# Altium PCB FPv1.3.2.PcbDoc (part 3 of 9)
Units mm, origin at the board's own origin, x right, y up, seen from the top; angles counter-clockwise.
Board outline 81.28 x 53.34 mm, 4 copper layers (Top Layer, GROUND PLANE, POWER PLANE, Bottom Layer); 98 components, 183 nets, 614 pads, 312 vias.
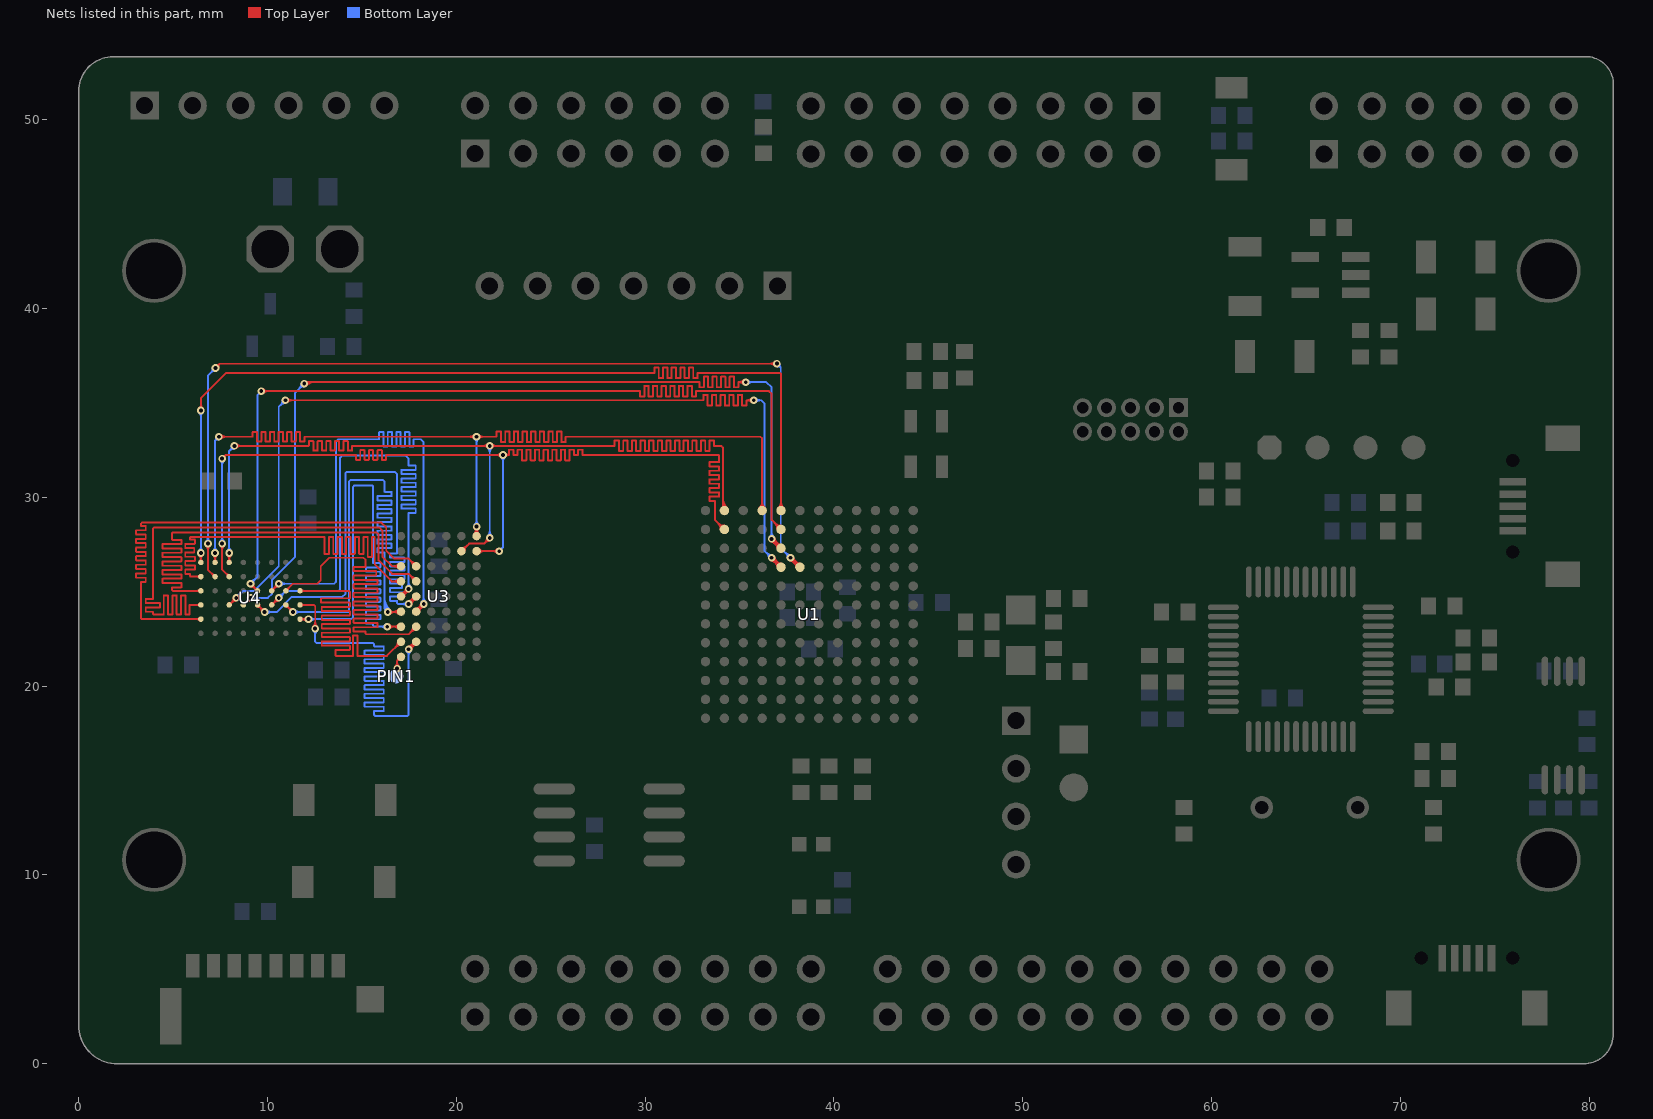
[diagram p5: the nets of this part, all layers, seen from the top]

## Via types
v1: diameter 0.403, hole 0.2, Top Layer to Bottom Layer, tented both sides, 261 vias
v2: diameter 0.503, hole 0.3, Top Layer to Bottom Layer, tented both sides, 25 vias
v3: diameter 0.6, hole 0.4, Top Layer to Bottom Layer, tented both sides, 11 vias
v4: diameter 0.508, hole 0.33, Top Layer to Bottom Layer, tented both sides, 5 vias
v5: diameter 0.703, hole 0.4, Top Layer to Bottom Layer, tented both sides, 3 vias
v6: diameter 0.603, hole 0.4, Top Layer to Bottom Layer, tented both sides, 2 vias
v7: diameter 0.503, hole 0.25, Top Layer to Bottom Layer, tented both sides, 2 vias
v8: diameter 0.6, hole 0.24, Top Layer to Bottom Layer, tented both sides, 1 vias
v9: diameter 0.508, hole 0.349, Top Layer to Bottom Layer, tented both sides, 1 vias
v10: diameter 0.603, hole 0.3, Top Layer to Bottom Layer, tented both sides, 1 vias

## Nets (pads, with @x,y where several pads share a name; then routed paths per layer and width w, separated by ;. In a path a pad name is that pad's centre, name@x,y a point inside that pad or via, vN(x,y) a via of type N, cw(c..) or ccw(c..) an arc to the next point about the centre after c; other vN are vias at no path point) (continued)
AD13: U1.B11 U3.B6 U4.F2 | length 65.9
  Top Layer w0.102: v1@7.493,27.443 cw(c7.236,27.186) 7.6,27.186 cw(c7.964,27.186) v1@7.707,27.443 ; v1(7.6,27.55) 7.6,26.175 U4.F2@7.975,25.8 ; v1(7.6,32.05) 7.792,32.242 ; v1@7.634,32.197 ccw(c7.673,32.361) 7.792,32.242 ; v1@7.747,32.084 cw(c7.911,32.123) 7.792,32.242 ; U4.F2@7.881,25.8 ccw(c7.653,25.8) 7.814,25.961 ccw(c7.975,26.122) U4.F2@7.975,25.894 ; U3.B6@21.075,27.15 v1(22.275,27.15) ; U3.B6@21.198,27.027 cw(c21.496,26.729) 21.496,27.15 cw(c21.496,27.571) U3.B6@21.198,27.273 ; v1@22.168,27.043 ccw(c21.911,26.786) 21.911,27.15 ccw(c21.911,27.514) v1@22.168,27.257 ; v1@22.368,32.135 ccw(c22.111,31.878) 22.111,32.242 ccw(c22.111,32.606) v1@22.368,32.348 ; v1@22.591,32.145 cw(c22.796,31.974) 22.796,32.242 ; v1@22.591,32.338 ccw(c22.796,32.509) 22.796,32.242 ; U1.B11@34.001,28.3 ccw(c33.52,28.3) 33.86,28.64 ccw(c34.2,28.98) U1.B11@34.2,28.499 ; U1.B11@34.2,28.3 33.706,28.794 33.706,29.807 33.415,29.807 cw(c33.415,29.818) 33.403,29.818 33.403,30.024 cw(c33.415,30.024) 33.415,30.035 33.907,30.035 ccw(c33.907,30.047) 33.918,30.047 33.918,30.253 ccw(c33.907,30.253) 33.907,30.264 33.415,30.264 cw(c33.415,30.276) 33.403,30.276 33.403,30.481 cw(c33.415,30.481) 33.415,30.493 33.907,30.493 ccw(c33.907,30.504) 33.918,30.504 33.918,30.71 ccw(c33.907,30.71) 33.907,30.721 33.415,30.721 cw(c33.415,30.733) 33.403,30.733 33.403,30.938 cw(c33.415,30.938) 33.415,30.95 33.907,30.95 ccw(c33.907,30.961) 33.918,30.961 33.918,31.167 ccw(c33.907,31.167) 33.907,31.178 33.415,31.178 cw(c33.415,31.19) 33.403,31.19 33.403,31.396 cw(c33.415,31.396) 33.415,31.407 33.907,31.407 ccw(c33.907,31.419) 33.918,31.419 33.918,31.624 ccw(c33.907,31.624) 33.907,31.636 33.415,31.636 cw(c33.415,31.647) 33.403,31.647 33.403,31.853 cw(c33.415,31.853) 33.415,31.864 33.907,31.864 ; 7.792,32.242 14.663,32.242 cw(c14.663,32.219) 14.686,32.219 14.686,32.011 ccw(c14.708,32.011) 14.708,31.988 14.891,31.988 ccw(c14.891,32.011) 14.914,32.011 14.914,32.473 cw(c14.937,32.473) 14.937,32.496 15.12,32.496 cw(c15.12,32.473) 15.143,32.473 15.143,32.011 ccw(c15.166,32.011) 15.166,31.988 15.348,31.988 ccw(c15.348,32.011) 15.371,32.011 15.371,32.473 cw(c15.394,32.473) 15.394,32.496 15.577,32.496 cw(c15.577,32.473) 15.6,32.473 15.6,32.011 ccw(c15.623,32.011) 15.623,31.988 15.806,31.988 ccw(c15.806,32.011) 15.829,32.011 15.829,32.473 cw(c15.851,32.473) 15.851,32.496 16.034,32.496 cw(c16.034,32.473) 16.057,32.473 16.057,32.011 ccw(c16.08,32.011) 16.08,31.988 16.263,31.988 ccw(c16.263,32.011) 16.286,32.011 16.286,32.219 cw(c16.309,32.219) 16.309,32.242 v1(22.475,32.242) 22.796,32.242 ; 22.796,32.242 22.796,32.51 cw(c22.808,32.51) 22.808,32.522 23.014,32.522 cw(c23.014,32.51) 23.025,32.51 23.025,32.242 23.254,32.242 23.254,32.51 cw(c23.265,32.51) 23.265,32.522 23.471,32.522 cw(c23.471,32.51) 23.482,32.51 23.482,31.973 ccw(c23.494,31.973) 23.494,31.961 23.699,31.961 ccw(c23.699,31.973) 23.711,31.973 23.711,32.51 cw(c23.722,32.51) 23.722,32.522 23.928,32.522 cw(c23.928,32.51) 23.939,32.51 23.939,31.973 ccw(c23.951,31.973) 23.951,31.961 24.157,31.961 ccw(c24.157,31.973) 24.168,31.973 24.168,32.51 cw(c24.18,32.51) 24.18,32.522 24.385,32.522 cw(c24.385,32.51) 24.397,32.51 24.397,31.973 ccw(c24.408,31.973) 24.408,31.961 24.614,31.961 ccw(c24.614,31.973) 24.625,31.973 24.625,32.51 cw(c24.637,32.51) 24.637,32.522 24.842,32.522 cw(c24.842,32.51) 24.854,32.51 24.854,31.973 ccw(c24.865,31.973) 24.865,31.961 25.071,31.961 ccw(c25.071,31.973) 25.082,31.973 25.082,32.51 cw(c25.094,32.51) 25.094,32.522 25.3,32.522 cw(c25.3,32.51) 25.311,32.51 25.311,31.973 ccw(c25.323,31.973) 25.323,31.961 25.528,31.961 ccw(c25.528,31.973) 25.54,31.973 25.54,32.51 cw(c25.551,32.51) 25.551,32.522 25.757,32.522 cw(c25.757,32.51) 25.768,32.51 25.768,31.973 ccw(c25.78,31.973) 25.78,31.961 25.985,31.961 ccw(c25.985,31.973) 25.997,31.973 25.997,32.51 cw(c26.008,32.51) 26.008,32.522 26.214,32.522 cw(c26.214,32.51) 26.226,32.51 26.226,32.242 26.454,32.242 26.454,32.51 cw(c26.466,32.51) 26.466,32.522 26.671,32.522 cw(c26.671,32.51) 26.683,32.51 26.683,32.242 33.9,32.242 33.918,32.224 33.918,31.876 ; 33.907,31.864 ccw(c33.907,31.876) 33.918,31.876 ; 33.907,31.864 33.918,31.876
  Bottom Layer w0.102: v1@7.493,27.657 ccw(c7.236,27.914) 7.6,27.914 ccw(c7.964,27.914) v1@7.707,27.657 ; v1@7.493,31.943 cw(c7.236,31.686) 7.6,31.686 cw(c7.964,31.686) v1@7.707,31.943 ; v1@7.6,27.525 v1(7.6,27.55) v1(7.6,32.05) ; v1(22.275,27.15) 22.475,27.35 v1(22.475,32.242) ; v1@22.368,32.135 cw(c22.111,31.878) 22.475,31.878 cw(c22.839,31.878) v1@22.582,32.135
AD14: U1.B12 U3.B5 U4.F1 | length 67.3
  Top Layer w0.102: v1@7.868,26.943 cw(c7.611,26.686) 7.975,26.686 cw(c8.339,26.686) v1@8.082,26.943 ; U4.F1@7.908,26.617 ccw(c7.748,26.777) 7.975,26.777 ccw(c8.202,26.777) U4.F1@8.042,26.617 ; U4.F1@7.975,26.55 v1(7.975,27.05) v1@7.975,27.1 ; v1(8.25,32.725) 12.175,32.725 12.2,32.75 12.2,32.956 cw(c12.223,32.956) 12.223,32.979 12.405,32.979 cw(c12.405,32.956) 12.428,32.956 12.428,32.494 ccw(c12.451,32.494) 12.451,32.471 12.634,32.471 ccw(c12.634,32.494) 12.657,32.494 12.657,32.956 cw(c12.68,32.956) 12.68,32.979 12.863,32.979 cw(c12.863,32.956) 12.886,32.956 12.886,32.494 ccw(c12.908,32.494) 12.908,32.471 13.091,32.471 ccw(c13.091,32.494) 13.114,32.494 13.114,32.956 cw(c13.137,32.956) 13.137,32.979 13.32,32.979 cw(c13.32,32.956) 13.343,32.956 13.343,32.494 ccw(c13.366,32.494) 13.366,32.471 13.548,32.471 ccw(c13.548,32.494) 13.571,32.494 13.571,32.956 cw(c13.594,32.956) 13.594,32.979 13.777,32.979 cw(c13.777,32.956) 13.8,32.956 13.8,32.494 ccw(c13.823,32.494) 13.823,32.471 14.006,32.471 ccw(c14.006,32.494) 14.029,32.494 14.029,32.956 cw(c14.051,32.956) 14.051,32.979 14.234,32.979 cw(c14.234,32.956) 14.257,32.956 14.257,32.494 ccw(c14.28,32.494) 14.28,32.471 14.463,32.471 ccw(c14.463,32.494) 14.486,32.494 14.486,32.702 cw(c14.509,32.702) 14.509,32.725 v1(21.775,32.725) 28.384,32.725 28.384,33.005 28.613,33.005 28.613,32.445 28.842,32.445 28.842,33.005 29.07,33.005 29.07,32.445 29.299,32.445 29.299,33.005 29.527,33.005 29.527,32.445 29.756,32.445 29.756,33.005 29.985,33.005 29.985,32.445 30.213,32.445 30.213,33.005 30.442,33.005 30.442,32.445 30.67,32.445 30.67,33.005 30.899,33.005 30.899,32.445 31.128,32.445 31.128,33.005 31.356,33.005 31.356,32.445 31.585,32.445 31.585,33.005 31.813,33.005 31.813,32.445 32.042,32.445 32.042,33.005 32.271,33.005 32.271,32.445 32.499,32.445 32.499,33.005 32.728,33.005 32.728,32.445 32.956,32.445 32.956,33.005 33.185,33.005 33.185,32.445 33.414,32.445 33.414,33.005 33.642,33.005 33.642,32.725 34.026,32.725 34.121,32.63 34.121,29.379 U1.B12@34.2,29.3 ; v1@8.357,32.618 cw(c8.614,32.361) 8.614,32.725 cw(c8.614,33.089) v1@8.357,32.832 ; U3.B5@20.275,27.15 20.675,27.55 21.475,27.55 v1(21.775,27.85) ; U3.B5@20.275,27.324 ccw(c20.275,27.745) 20.572,27.447 ccw(c20.87,27.15) U3.B5@20.449,27.15 ; v1@21.624,27.85 cw(c21.26,27.85) 21.518,27.593 cw(c21.775,27.335) v1@21.775,27.699 ; v1@21.668,32.618 ccw(c21.411,32.361) 21.411,32.725 ccw(c21.411,33.089) v1@21.668,32.832 ; v1@21.882,32.618 cw(c22.139,32.361) 22.139,32.725 cw(c22.139,33.089) v1@21.882,32.832 ; U1.B12@34.059,29.441 ccw(c33.91,29.59) 34.121,29.59 ; 34.121,29.726 ccw(c34.626,29.726) U1.B12@34.269,29.369 ; 34.121,29.971 ccw(c34.871,29.971) U1.B12@34.341,29.441
  Bottom Layer w0.102: v1@7.868,27.157 ccw(c7.611,27.414) 7.975,27.414 ccw(c8.339,27.414) v1@8.082,27.157 ; v1(7.975,27.05) 7.975,32.45 v1(8.25,32.725) ; v1@8.099,32.725 cw(c7.735,32.725) 7.993,32.468 cw(c8.25,32.21) v1@8.25,32.574 ; v1@21.668,27.957 ccw(c21.411,28.214) 21.775,28.214 ccw(c22.139,28.214) v1@21.882,27.957 ; v1@21.668,32.618 cw(c21.411,32.361) 21.775,32.361 cw(c22.139,32.361) v1@21.882,32.618 ; v1(21.775,27.85) v1(21.775,32.725)
AD15: U1.D12 U3.A6 U4.G1 | length 66.6
  Top Layer w0.102: v1@7.118,26.943 cw(c6.861,26.686) 7.225,26.686 cw(c7.589,26.686) v1@7.332,26.943 ; U4.G1@7.158,26.617 ccw(c6.998,26.777) 7.225,26.777 ccw(c7.452,26.777) U4.G1@7.292,26.617 ; U4.G1@7.225,26.55 v1(7.225,27.05) ; v1(7.429,33.208) 9.195,33.208 ccw(c9.195,33.231) 9.217,33.231 9.217,33.439 cw(c9.24,33.439) 9.24,33.462 9.423,33.462 cw(c9.423,33.439) 9.446,33.439 9.446,32.977 ccw(c9.469,32.977) 9.469,32.954 9.652,32.954 ccw(c9.652,32.977) 9.675,32.977 9.675,33.439 cw(c9.698,33.439) 9.698,33.462 9.88,33.462 cw(c9.88,33.439) 9.903,33.439 9.903,32.977 ccw(c9.926,32.977) 9.926,32.954 10.109,32.954 ccw(c10.109,32.977) 10.132,32.977 10.132,33.439 cw(c10.155,33.439) 10.155,33.462 10.338,33.462 cw(c10.338,33.439) 10.36,33.439 10.36,32.977 ccw(c10.383,32.977) 10.383,32.954 10.566,32.954 ccw(c10.566,32.977) 10.589,32.977 10.589,33.439 cw(c10.612,33.439) 10.612,33.462 10.795,33.462 cw(c10.795,33.439) 10.818,33.439 10.818,32.977 ccw(c10.841,32.977) 10.841,32.954 11.023,32.954 ccw(c11.023,32.977) 11.046,32.977 11.046,33.439 cw(c11.069,33.439) 11.069,33.462 11.252,33.462 cw(c11.252,33.439) 11.275,33.439 11.275,32.977 ccw(c11.298,32.977) 11.298,32.954 11.481,32.954 ccw(c11.481,32.977) 11.503,32.977 11.503,33.439 cw(c11.526,33.439) 11.526,33.462 11.709,33.462 cw(c11.709,33.439) 11.732,33.439 11.732,32.977 ccw(c11.755,32.977) 11.755,32.954 11.938,32.954 ccw(c11.938,32.977) 11.961,32.977 11.961,33.185 cw(c11.984,33.185) 11.984,33.208 v1(21.071,33.208) 22.136,33.208 22.136,33.477 cw(c22.148,33.477) 22.148,33.488 22.353,33.488 cw(c22.353,33.477) 22.365,33.477 22.365,32.94 ccw(c22.376,32.94) 22.376,32.928 22.582,32.928 ccw(c22.582,32.94) 22.593,32.94 22.593,33.477 cw(c22.605,33.477) 22.605,33.488 22.81,33.488 cw(c22.81,33.477) 22.822,33.477 22.822,32.94 ccw(c22.833,32.94) 22.833,32.928 23.039,32.928 ccw(c23.039,32.94) 23.05,32.94 23.05,33.477 cw(c23.062,33.477) 23.062,33.488 23.268,33.488 cw(c23.268,33.477) 23.279,33.477 23.279,32.94 ccw(c23.291,32.94) 23.291,32.928 23.496,32.928 ccw(c23.496,32.94) 23.508,32.94 23.508,33.477 cw(c23.519,33.477) 23.519,33.488 23.725,33.488 cw(c23.725,33.477) 23.736,33.477 23.736,32.94 ccw(c23.748,32.94) 23.748,32.928 23.953,32.928 ccw(c23.953,32.94) 23.965,32.94 23.965,33.477 cw(c23.976,33.477) 23.976,33.488 24.182,33.488 cw(c24.182,33.477) 24.194,33.477 24.194,32.94 ccw(c24.205,32.94) 24.205,32.928 24.411,32.928 ccw(c24.411,32.94) 24.422,32.94 24.422,33.477 cw(c24.434,33.477) 24.434,33.488 24.639,33.488 cw(c24.639,33.477) 24.651,33.477 24.651,32.94 ccw(c24.662,32.94) 24.662,32.928 24.868,32.928 ccw(c24.868,32.94) 24.879,32.94 24.879,33.477 cw(c24.891,33.477) 24.891,33.488 25.096,33.488 cw(c25.096,33.477) 25.108,33.477 25.108,32.94 ccw(c25.119,32.94) 25.119,32.928 25.325,32.928 ccw(c25.325,32.94) 25.336,32.94 25.336,33.477 cw(c25.348,33.477) 25.348,33.488 25.554,33.488 cw(c25.554,33.477) 25.565,33.477 25.565,32.94 ccw(c25.577,32.94) 25.577,32.928 25.782,32.928 ccw(c25.782,32.94) 25.794,32.94 25.794,33.208 36.108,33.208 36.2,33.117 U1.D12@36.2,29.3 ; v1@7.536,33.102 cw(c7.793,32.844) 7.793,33.208 cw(c7.793,33.572) v1@7.536,33.315 ; U3.A6@20.952,28.073 ccw(c20.654,28.371) 21.075,28.371 ccw(c21.496,28.371) U3.A6@21.198,28.073 ; v1@20.964,33.102 ccw(c20.707,32.844) 20.707,33.208 ccw(c20.707,33.572) v1@20.964,33.315 ; v1@20.968,28.343 cw(c20.711,28.086) 21.075,28.086 cw(c21.439,28.086) v1@21.182,28.343 ; v1@20.982,28.331 cw(c20.902,28.228) 21.028,28.195 cw(c21.193,28.15) v1@21.13,28.31 ; v1@21.02,28.31 cw(c20.956,28.15) 21.122,28.195 cw(c21.248,28.228) v1@21.168,28.331 ; U3.A6@21.075,27.95 v1(21.075,28.45) ; v1@21.177,33.102 cw(c21.435,32.844) 21.435,33.208 cw(c21.435,33.572) v1@21.177,33.315 ; U1.D12@36.059,29.441 ccw(c35.719,29.781) 36.2,29.781 ccw(c36.681,29.781) U1.D12@36.341,29.441
  Bottom Layer w0.102: v1@7.118,27.157 ccw(c6.861,27.414) 7.225,27.414 ccw(c7.589,27.414) v1@7.332,27.157 ; v1(7.225,27.05) 7.225,33.004 ; v1@7.281,33.182 cw(c7.083,33.146) 7.225,33.004 ; v1@7.403,33.06 ccw(c7.367,32.862) 7.225,33.004 ; v1(7.429,33.208) 7.225,33.004 ; v1@20.964,33.102 cw(c20.696,32.834) 21.075,32.834 ; v1@20.968,28.557 ccw(c20.711,28.814) 21.075,28.814 ccw(c21.439,28.814) v1@21.182,28.557 ; v1(21.071,33.208) 21.075,33.204 v1(21.075,28.45) ; 21.075,32.855 cw(c21.424,32.855) v1@21.177,33.102
AD16: U1.E9 U4.F4 | length 60.3
  Top Layer w0.102: U4.F4@7.975,24.3 v1(8.35,24.675) ; U4.F4@7.975,24.394 ccw(c7.975,24.621) 8.136,24.461 ; U4.F4@8.069,24.3 cw(c8.297,24.3) 8.136,24.461 ; v1@8.199,24.675 cw(c7.835,24.675) 8.092,24.418 cw(c8.35,24.16) v1@8.35,24.524 ; v1(10.95,35.142) 33.084,35.142 33.084,35.41 cw(c33.095,35.41) 33.095,35.422 33.301,35.422 cw(c33.301,35.41) 33.312,35.41 33.312,34.873 ccw(c33.324,34.873) 33.324,34.861 33.529,34.861 ccw(c33.529,34.873) 33.541,34.873 33.541,35.41 cw(c33.552,35.41) 33.552,35.422 33.758,35.422 cw(c33.758,35.41) 33.769,35.41 33.769,34.873 ccw(c33.781,34.873) 33.781,34.861 33.986,34.861 ccw(c33.986,34.873) 33.998,34.873 33.998,35.41 cw(c34.009,35.41) 34.009,35.422 34.215,35.422 cw(c34.215,35.41) 34.227,35.41 34.227,34.873 ccw(c34.238,34.873) 34.238,34.861 34.444,34.861 ccw(c34.444,34.873) 34.455,34.873 34.455,35.41 cw(c34.467,35.41) 34.467,35.422 34.672,35.422 cw(c34.672,35.41) 34.684,35.41 34.684,34.873 ccw(c34.695,34.873) 34.695,34.861 34.901,34.861 ccw(c34.901,34.873) 34.912,34.873 34.912,35.41 cw(c34.924,35.41) 34.924,35.422 35.129,35.422 cw(c35.129,35.41) 35.141,35.41 35.141,34.873 ccw(c35.152,34.873) 35.152,34.861 35.358,34.861 ccw(c35.358,34.873) 35.369,34.873 35.369,35.142 v1(35.75,35.142) ; v1@11.057,35.035 cw(c11.314,34.778) 11.314,35.142 cw(c11.314,35.505) v1@11.057,35.248 ; v1@35.643,35.035 ccw(c35.386,34.778) 35.386,35.142 ccw(c35.386,35.505) v1@35.643,35.248 ; v1@36.662,26.654 cw(c36.521,26.118) U1.E9@37.001,26.395 ; v1@36.688,26.753 cw(c36.608,26.449) 36.88,26.606 ; v1@36.7,26.649 cw(c36.7,26.285) 36.957,26.543 cw(c37.215,26.8) v1@36.851,26.8 ; v1(36.7,26.8) U1.E9@37.2,26.3 ; v1@36.747,26.812 ccw(c37.051,26.892) 36.894,26.62 ; v1@36.75,26.658 cw(c36.785,26.558) 36.877,26.611 ; v1@36.842,26.75 ccw(c36.942,26.715) 36.889,26.623 ; v1@36.846,26.838 ccw(c37.382,26.979) U1.E9@37.105,26.499 ; U1.E9@37.001,26.3 ccw(c36.52,26.3) 36.86,26.64 ccw(c37.2,26.98) U1.E9@37.2,26.499 ; v1@36.739,26.654 cw(c36.781,26.496) 36.863,26.638 ccw(c36.781,26.496) v1@36.739,26.654 ; v1@36.846,26.761 ccw(c37.004,26.719) 36.862,26.637 cw(c37.004,26.719) v1@36.846,26.761
  Bottom Layer w0.102: v1(8.35,24.675) 8.725,25.05 9.3,25.05 10.6,26.35 10.6,34.792 v1(10.95,35.142) ; v1@8.35,24.826 ccw(c8.35,25.19) 8.607,24.932 ccw(c8.865,24.675) v1@8.501,24.675 ; v1@10.799,35.142 cw(c10.435,35.142) 10.693,34.884 cw(c10.95,34.627) v1@10.95,34.991 ; v1(35.75,35.142) 36.156,35.142 36.322,34.976 36.322,27.178 v1(36.7,26.8) ; v1@35.857,35.035 cw(c36.114,34.778) 36.114,35.142 cw(c36.114,35.505) v1@35.857,35.248 ; v1@36.549,26.8 ccw(c36.185,26.8) 36.443,27.057 ccw(c36.7,27.315) v1@36.7,26.951
AD17: U1.E10 U4.E4 | length 60.3
  Top Layer w0.102: U4.E4@8.725,24.3 v1(9.1,24.675) ; U4.E4@8.725,24.394 ccw(c8.725,24.622) 8.886,24.461 ccw(c9.047,24.3) U4.E4@8.819,24.3 ; v1@8.949,24.675 cw(c8.585,24.675) 8.843,24.418 cw(c9.1,24.16) v1@9.1,24.524 ; v1(11.95,36.025) 12.033,36.108 32.88,36.108 32.88,35.84 ccw(c32.892,35.84) 32.892,35.828 33.097,35.828 ccw(c33.097,35.84) 33.109,35.84 33.109,36.377 cw(c33.12,36.377) 33.12,36.388 33.326,36.388 cw(c33.326,36.377) 33.337,36.377 33.337,35.84 ccw(c33.349,35.84) 33.349,35.828 33.555,35.828 ccw(c33.555,35.84) 33.566,35.84 33.566,36.377 cw(c33.578,36.377) 33.578,36.388 33.783,36.388 cw(c33.783,36.377) 33.795,36.377 33.795,35.84 ccw(c33.806,35.84) 33.806,35.828 34.012,35.828 ccw(c34.012,35.84) 34.023,35.84 34.023,36.377 cw(c34.035,36.377) 34.035,36.388 34.24,36.388 cw(c34.24,36.377) 34.252,36.377 34.252,35.84 ccw(c34.263,35.84) 34.263,35.828 34.469,35.828 ccw(c34.469,35.84) 34.48,35.84 34.48,36.377 cw(c34.492,36.377) 34.492,36.388 34.698,36.388 cw(c34.698,36.377) 34.709,36.377 34.709,35.84 ccw(c34.721,35.84) 34.721,35.828 34.926,35.828 ccw(c34.926,35.84) 34.938,35.84 34.938,36.108 35.317,36.108 v1(35.325,36.1) ; v1@11.985,35.99 cw(c12.27,35.705) 12.27,36.108 ; v1@12.057,35.918 cw(c12.515,35.46) 12.515,36.108 ; 34.941,36.108 cw(c34.941,35.716) v1@35.218,35.993 ; 34.981,36.108 ccw(c34.981,36.444) v1@35.218,36.207 ; v1@36.662,27.654 cw(c36.521,27.118) U1.E10@37.001,27.395 ; v1@36.688,27.753 cw(c36.608,27.449) 36.88,27.606 ; v1@36.7,27.649 cw(c36.7,27.285) 36.957,27.543 cw(c37.215,27.8) v1@36.851,27.8 ; v1(36.7,27.8) U1.E10@37.2,27.3 ; v1@36.747,27.812 ccw(c37.051,27.892) 36.894,27.62 ; v1@36.75,27.658 cw(c36.785,27.558) 36.877,27.611 ; v1@36.842,27.75 ccw(c36.942,27.715) 36.889,27.623 ; v1@36.846,27.838 ccw(c37.382,27.979) U1.E10@37.105,27.499 ; U1.E10@37.001,27.3 ccw(c36.52,27.3) 36.86,27.64 ccw(c37.2,27.98) U1.E10@37.2,27.499 ; v1@36.739,27.654 cw(c36.781,27.496) 36.863,27.638 ccw(c36.781,27.496) v1@36.739,27.654 ; v1@36.846,27.761 ccw(c37.004,27.719) 36.862,27.637 cw(c37.004,27.719) v1@36.846,27.761
  Bottom Layer w0.102: v1(9.1,24.675) 10.025,24.675 10.25,24.9 10.25,25.274 10.246,25.278 10.246,25.634 11.45,26.838 11.45,35.525 v1(11.95,36.025) ; v1@9.207,24.568 cw(c9.464,24.311) 9.464,24.675 cw(c9.464,25.039) v1@9.207,24.782 ; v1@11.799,36.025 cw(c11.435,36.025) 11.693,35.768 cw(c11.95,35.51) v1@11.95,35.874 ; v1(35.325,36.1) 36.417,36.1 36.7,35.817 v1(36.7,27.8) ; v1@35.432,35.993 cw(c35.689,35.736) 35.689,36.1 cw(c35.689,36.464) v1@35.432,36.207 ; v1@36.593,27.907 ccw(c36.336,28.164) 36.7,28.164 ccw(c37.064,28.164) v1@36.807,27.907
AD18: U1.E11 U4.D3 | length 55.4
  Top Layer w0.102: v1@9.1,25.274 cw(c9.1,24.91) 9.357,25.168 cw(c9.615,25.425) v1@9.251,25.425 ; v1(9.1,25.425) U4.D3@9.475,25.05 ; U4.D3@9.381,25.05 ccw(c9.153,25.05) 9.314,25.211 ccw(c9.475,25.372) U4.D3@9.475,25.144 ; v1(9.675,35.625) 29.731,35.625 29.731,35.356 ccw(c29.742,35.356) 29.742,35.345 29.948,35.345 ccw(c29.948,35.356) 29.959,35.356 29.959,35.894 cw(c29.971,35.894) 29.971,35.905 30.176,35.905 cw(c30.176,35.894) 30.188,35.894 30.188,35.356 ccw(c30.199,35.356) 30.199,35.345 30.405,35.345 ccw(c30.405,35.356) 30.416,35.356 30.416,35.894 cw(c30.428,35.894) 30.428,35.905 30.634,35.905 cw(c30.634,35.894) 30.645,35.894 30.645,35.356 ccw(c30.657,35.356) 30.657,35.345 30.862,35.345 ccw(c30.862,35.356) 30.874,35.356 30.874,35.894 cw(c30.885,35.894) 30.885,35.905 31.091,35.905 cw(c31.091,35.894) 31.102,35.894 31.102,35.356 ccw(c31.114,35.356) 31.114,35.345 31.319,35.345 ccw(c31.319,35.356) 31.331,35.356 31.331,35.894 cw(c31.342,35.894) 31.342,35.905 31.548,35.905 cw(c31.548,35.894) 31.559,35.894 31.559,35.356 ccw(c31.571,35.356) 31.571,35.345 31.777,35.345 ccw(c31.777,35.356) 31.788,35.356 31.788,35.894 cw(c31.8,35.894) 31.8,35.905 32.005,35.905 cw(c32.005,35.894) 32.017,35.894 32.017,35.356 ccw(c32.028,35.356) 32.028,35.345 32.234,35.345 ccw(c32.234,35.356) 32.245,35.356 32.245,35.894 cw(c32.257,35.894) 32.257,35.905 32.462,35.905 cw(c32.462,35.894) 32.474,35.894 32.474,35.356 ccw(c32.485,35.356) 32.485,35.345 32.691,35.345 ccw(c32.691,35.356) 32.703,35.356 32.703,35.625 36.562,35.625 36.7,35.487 36.7,28.8 U1.E11@37.2,28.3 ; v1@9.782,35.518 cw(c10.039,35.261) 10.039,35.625 cw(c10.039,35.989) v1@9.782,35.732 ; U1.E11@37.001,28.3 ccw(c36.52,28.3) 36.86,28.64 ccw(c37.2,28.98) U1.E11@37.2,28.499
  Bottom Layer w0.102: v1(9.1,25.425) 9.475,25.8 9.475,35.425 v1(9.675,35.625) ; v1@9.1,25.576 ccw(c9.1,25.94) 9.357,25.682 ccw(c9.615,25.425) v1@9.251,25.425
AD19: U1.E12 U4.H1 | length 56.1
  Top Layer w0.102: v1@6.368,26.943 cw(c6.111,26.686) 6.475,26.686 cw(c6.839,26.686) v1@6.582,26.943 ; v1@6.368,34.707 ccw(c6.081,34.994) 6.488,34.994 ; U4.H1@6.408,26.617 ccw(c6.248,26.777) 6.475,26.777 ccw(c6.702,26.777) U4.H1@6.542,26.617 ; U4.H1@6.475,26.55 v1(6.475,27.05) ; v1@6.488,34.613 6.488,35.262 7.817,36.592 30.493,36.592 30.493,36.86 cw(c30.504,36.86) 30.504,36.872 30.71,36.872 cw(c30.71,36.86) 30.721,36.86 30.721,36.323 ccw(c30.733,36.323) 30.733,36.311 30.938,36.311 ccw(c30.938,36.323) 30.95,36.323 30.95,36.86 cw(c30.961,36.86) 30.961,36.872 31.167,36.872 cw(c31.167,36.86) 31.178,36.86 31.178,36.323 ccw(c31.19,36.323) 31.19,36.311 31.396,36.311 ccw(c31.396,36.323) 31.407,36.323 31.407,36.86 cw(c31.419,36.86) 31.419,36.872 31.624,36.872 cw(c31.624,36.86) 31.636,36.86 31.636,36.323 ccw(c31.647,36.323) 31.647,36.311 31.853,36.311 ccw(c31.853,36.323) 31.864,36.323 31.864,36.86 cw(c31.876,36.86) 31.876,36.872 32.081,36.872 cw(c32.081,36.86) 32.093,36.86 32.093,36.323 ccw(c32.104,36.323) 32.104,36.311 32.31,36.311 ccw(c32.31,36.323) 32.322,36.323 32.322,36.86 cw(c32.333,36.86) 32.333,36.872 32.539,36.872 cw(c32.539,36.86) 32.55,36.86 32.55,36.323 ccw(c32.562,36.323) 32.562,36.311 32.767,36.311 ccw(c32.767,36.323) 32.779,36.323 32.779,36.592 37.145,36.592 37.2,36.536 U1.E12@37.2,29.3 ; 6.488,34.934 ccw(c6.809,34.934) v1@6.582,34.707 ; U1.E12@37.059,29.441 ccw(c36.719,29.781) 37.2,29.781 ccw(c37.681,29.781) U1.E12@37.341,29.441
  Bottom Layer w0.102: v1@6.368,27.157 ccw(c6.111,27.414) 6.475,27.414 ccw(c6.839,27.414) v1@6.582,27.157 ; v1@6.368,34.493 cw(c6.111,34.236) 6.475,34.236 cw(c6.839,34.236) v1@6.582,34.493 ; v1(6.475,27.05) v1(6.475,34.6)
AD20: U1.F9 U4.G2 | length 60.1
  Top Layer w0.102: v1@6.743,27.443 cw(c6.486,27.186) 6.85,27.186 cw(c7.214,27.186) v1@6.957,27.443 ; v1(6.85,27.55) 6.85,26.175 U4.G2@7.225,25.8 ; U4.G2@7.131,25.8 ccw(c6.903,25.8) 7.064,25.961 ccw(c7.225,26.122) U4.G2@7.225,25.894 ; v1(7.25,36.85) 7.475,37.075 ; v1@7.265,37 ccw(c7.291,37.259) 7.475,37.075 ; v1@7.4,36.865 cw(c7.659,36.891) 7.475,37.075 ; 36.597,37.075 ccw(c36.597,37.47) v1@36.876,37.191 ; 36.64,37.075 cw(c36.64,36.742) v1@36.876,36.977 ; v1@36.982,37.075 7.475,37.075 ; v1@37.662,26.654 cw(c37.521,26.118) U1.F9@38.001,26.395 ; v1@37.688,26.753 cw(c37.608,26.449) 37.88,26.606 ; v1@37.7,26.649 cw(c37.7,26.285) 37.957,26.543 cw(c38.215,26.8) v1@37.851,26.8 ; v1(37.7,26.8) U1.F9@38.2,26.3 ; v1@37.747,26.812 ccw(c38.051,26.892) 37.894,26.62 ; v1@37.75,26.658 cw(c37.785,26.558) 37.877,26.611 ; v1@37.842,26.75 ccw(c37.942,26.715) 37.889,26.623 ; v1@37.846,26.838 ccw(c38.382,26.979) U1.F9@38.105,26.499 ; U1.F9@38.001,26.3 ccw(c37.52,26.3) 37.86,26.64 ccw(c38.2,26.98) U1.F9@38.2,26.499 ; v1@37.739,26.654 cw(c37.781,26.496) 37.863,26.638 ccw(c37.781,26.496) v1@37.739,26.654 ; v1@37.846,26.761 ccw(c38.004,26.719) 37.862,26.637 cw(c38.004,26.719) v1@37.846,26.761
  Bottom Layer w0.102: v1@6.743,27.657 ccw(c6.477,27.923) 6.854,27.923 ; v1(6.85,27.55) 6.85,27.525 6.854,27.529 6.854,27.55 6.854,34.522 6.85,34.525 6.85,36.45 v1(7.25,36.85) ; 6.854,27.904 ccw(c7.204,27.904) v1@6.957,27.657 ; v1@7.099,36.85 cw(c6.735,36.85) 6.993,36.593 cw(c7.25,36.335) v1@7.25,36.699 ; v1(36.982,37.084) 37.186,36.881 ; v1@37.009,36.936 cw(c37.045,36.74) 37.186,36.881 ; v1@37.131,37.057 ccw(c37.326,37.021) 37.186,36.881 ; v1@37.549,26.8 ccw(c37.185,26.8) 37.443,27.057 ccw(c37.7,27.315) v1@37.7,26.951 ; v1(37.7,26.8) 37.186,27.314 37.186,36.881
ADDR0: PIN1.1 U3.J1 | length 1.6
  Top Layer w0.102: v1@16.759,21.036 ccw(c16.502,21.293) 16.866,21.293 ccw(c17.229,21.293) v1@16.972,21.036 ; v1(16.866,20.93) 16.866,21.341 ; U3.J1@16.907,21.502 cw(c16.749,21.457) 16.866,21.341 ; U3.J1@17.027,21.382 ccw(c16.982,21.224) 16.866,21.341 ; U3.J1@17.075,21.55 16.866,21.341
ADDR1: U3.H1 U4.A3 | length 31.4
  Top Layer w0.102: U4.A3@11.725,25.05 14.3,25.05 14.362,24.988 14.362,24.68 cw(c14.339,24.68) 14.339,24.657 12.861,24.657 ccw(c12.861,24.634) 12.838,24.634 12.838,24.451 ccw(c12.861,24.451) 12.861,24.429 14.339,24.429 cw(c14.339,24.406) 14.362,24.406 14.362,24.223 cw(c14.339,24.223) 14.339,24.2 12.901,24.2 ccw(c12.901,24.177) 12.878,24.177 12.878,23.994 ccw(c12.901,23.994) 12.901,23.971 14.339,23.971 cw(c14.339,23.948) 14.362,23.948 14.362,23.766 cw(c14.339,23.766) 14.339,23.743 12.901,23.743 ccw(c12.901,23.72) 12.878,23.72 12.878,23.537 ccw(c12.901,23.537) 12.901,23.514 14.339,23.514 cw(c14.339,23.491) 14.362,23.491 14.362,23.308 cw(c14.339,23.308) 14.339,23.286 12.901,23.286 ccw(c12.901,23.263) 12.878,23.263 12.878,23.08 ccw(c12.901,23.08) 12.901,23.057 14.339,23.057 cw(c14.339,23.034) 14.362,23.034 14.362,22.851 cw(c14.339,22.851) 14.339,22.828 12.901,22.828 ccw(c12.901,22.805) 12.878,22.805 12.878,22.623 ccw(c12.901,22.623) 12.901,22.6 14.339,22.6 cw(c14.339,22.577) 14.362,22.577 14.362,22.394 cw(c14.339,22.394) 14.339,22.371 12.901,22.371 ccw(c12.901,22.348) 12.878,22.348 12.878,22.165 ccw(c12.901,22.165) 12.901,22.143 14.339,22.143 cw(c14.339,22.12) 14.362,22.12 14.362,21.937 cw(c14.339,21.937) 14.339,21.914 13.623,21.914 ccw(c13.623,21.891) 13.6,21.891 13.6,21.625 13.625,21.6 14.516,21.6 ccw(c14.516,21.623) 14.539,21.623 14.539,22.663 cw(c14.562,22.663) 14.562,22.686 14.745,22.686 cw(c14.745,22.663) 14.768,22.663 14.768,21.6 16.325,21.6 U3.H1@17.075,22.35 ; U4.A3@11.792,24.983 cw(c11.952,24.823) 11.952,25.05 cw(c11.952,25.277) U4.A3@11.792,25.117 ; U3.H1@16.901,22.35 cw(c16.48,22.35) 16.778,22.053 cw(c17.075,21.755) U3.H1@17.075,22.176
ADDR2: U3.H2 U4.A4 | length 34.8
  Top Layer w0.102: U4.A4@11.725,24.3 12.45,24.3 12.53,24.22 v1@12.53,23.059 ; U4.A4@11.792,24.233 cw(c11.952,24.073) 11.952,24.3 cw(c11.952,24.527) U4.A4@11.792,24.367 ; v1@12.418,23.157 ccw(c12.149,23.426) 12.53,23.426 ; 12.53,23.402 ccw(c12.877,23.402) v1@12.632,23.157 ; v1@17.456,22.099 ccw(c17.415,22.423) U3.H2@17.697,22.26 ; v1(17.475,21.95) U3.H2@17.875,22.35 ; v1@17.475,22.101 ccw(c17.475,22.465) 17.732,22.207 ccw(c17.99,21.95) v1@17.626,21.95 ; v1@17.514,22.096 ccw(c17.575,22.323) 17.693,22.119 ; v1@17.621,21.989 cw(c17.848,22.05) 17.644,22.168 ; v1@17.624,21.931 cw(c17.948,21.89) U3.H2@17.785,22.172 ; U3.H2@17.701,22.35 cw(c17.28,22.35) 17.578,22.053 cw(c17.875,21.755) U3.H2@17.875,22.176
  Bottom Layer w0.102: v1@12.418,22.943 cw(c12.161,22.686) 12.525,22.686 cw(c12.889,22.686) v1@12.632,22.943 ; v1(12.525,23.05) 12.525,22.35 12.6,22.275 15.6,22.275 15.65,22.225 15.65,22.134 ccw(c15.673,22.134) 15.673,22.111 16.135,22.111 cw(c16.135,22.088) 16.158,22.088 16.158,21.905 cw(c16.135,21.905) 16.135,21.882 15.165,21.882 ccw(c15.165,21.859) 15.142,21.859 15.142,21.676 ccw(c15.165,21.676) 15.165,21.653 16.135,21.653 cw(c16.135,21.631) 16.158,21.631 16.158,21.448 cw(c16.135,21.448) 16.135,21.425 15.165,21.425 ccw(c15.165,21.402) 15.142,21.402 15.142,21.219 ccw(c15.165,21.219) 15.165,21.196 16.135,21.196 cw(c16.135,21.173) 16.158,21.173 16.158,20.991 cw(c16.135,20.991) 16.135,20.968 15.165,20.968 ccw(c15.165,20.945) 15.142,20.945 15.142,20.762 ccw(c15.165,20.762) 15.165,20.739 16.135,20.739 cw(c16.135,20.716) 16.158,20.716 16.158,20.533 cw(c16.135,20.533) 16.135,20.511 15.165,20.511 ccw(c15.165,20.488) 15.142,20.488 15.142,20.305 ccw(c15.165,20.305) 15.165,20.282 16.135,20.282 cw(c16.135,20.259) 16.158,20.259 16.158,20.076 cw(c16.135,20.076) 16.135,20.053 15.165,20.053 ccw(c15.165,20.03) 15.142,20.03 15.142,19.848 ccw(c15.165,19.848) 15.165,19.825 16.135,19.825 cw(c16.135,19.802) 16.158,19.802 16.158,19.619 cw(c16.135,19.619) 16.135,19.596 15.165,19.596 ccw(c15.165,19.573) 15.142,19.573 15.142,19.39 ccw(c15.165,19.39) 15.165,19.367 16.135,19.367 cw(c16.135,19.345) 16.158,19.345 16.158,19.162 cw(c16.135,19.162) 16.135,19.139 15.165,19.139 ccw(c15.165,19.116) 15.142,19.116 15.142,18.933 ccw(c15.165,18.933) 15.165,18.91 16.135,18.91 cw(c16.135,18.887) 16.158,18.887 16.158,18.705 cw(c16.135,18.705) 16.135,18.682 15.65,18.682 15.65,18.475 15.7,18.425 17.425,18.425 17.475,18.475 v1(17.475,21.95) ; 15.65,18.659 cw(c15.673,18.659) 15.673,18.682 ; v1@17.368,21.843 cw(c17.111,21.586) 17.475,21.586 cw(c17.839,21.586) v1@17.582,21.843
ADDR3: U3.G1 U4.A5 | length 33.4
  Top Layer w0.102: U4.A5@11.725,23.55 v1(12.175,23.55) ; U4.A5@11.792,23.483 cw(c11.952,23.323) 11.952,23.55 cw(c11.952,23.777) U4.A5@11.792,23.617 ; v1@12.068,23.443 ccw(c11.811,23.186) 11.811,23.55 ccw(c11.811,23.914) v1@12.068,23.657 ; v1(16.35,23.15) U3.G1@17.075,23.15 ; v1@16.457,23.043 cw(c16.714,22.786) 16.714,23.15 cw(c16.714,23.514) v1@16.457,23.257 ; U3.G1@16.952,23.027 ccw(c16.654,22.729) 16.654,23.15 ccw(c16.654,23.571) U3.G1@16.952,23.273
  Bottom Layer w0.102: v1(12.175,23.55) 14.425,23.55 14.531,23.656 14.531,30.559 14.605,30.632 15.545,30.632 15.599,30.578 15.599,26.539 ccw(c15.622,26.539) 15.622,26.516 15.957,26.516 cw(c15.957,26.493) 15.98,26.493 15.98,26.31 cw(c15.957,26.31) 15.957,26.287 15.241,26.287 ccw(c15.241,26.264) 15.218,26.264 15.218,26.081 ccw(c15.241,26.081) 15.241,26.058 15.957,26.058 cw(c15.957,26.036) 15.98,26.036 15.98,25.853 cw(c15.957,25.853) 15.957,25.83 15.241,25.83 ccw(c15.241,25.807) 15.218,25.807 15.218,25.624 ccw(c15.241,25.624) 15.241,25.601 15.957,25.601 cw(c15.957,25.578) 15.98,25.578 15.98,25.396 cw(c15.957,25.396) 15.957,25.373 15.241,25.373 ccw(c15.241,25.35) 15.218,25.35 15.218,25.167 ccw(c15.241,25.167) 15.241,25.144 15.957,25.144 cw(c15.957,25.121) 15.98,25.121 15.98,24.938 cw(c15.957,24.938) 15.957,24.915 15.241,24.915 ccw(c15.241,24.893) 15.218,24.893 15.218,24.71 ccw(c15.241,24.71) 15.241,24.687 15.957,24.687 cw(c15.957,24.664) 15.98,24.664 15.98,24.481 cw(c15.957,24.481) 15.957,24.458 15.241,24.458 ccw(c15.241,24.435) 15.218,24.435 15.218,24.253 ccw(c15.241,24.253) 15.241,24.23 15.957,24.23 cw(c15.957,24.207) 15.98,24.207 15.98,24.024 cw(c15.957,24.024) 15.957,24.001 15.241,24.001 ccw(c15.241,23.978) 15.218,23.978 15.218,23.795 ccw(c15.241,23.795) 15.241,23.772 15.957,23.772 cw(c15.957,23.75) 15.98,23.75 15.98,23.567 cw(c15.957,23.567) 15.957,23.544 15.241,23.544 ccw(c15.241,23.521) 15.218,23.521 15.218,23.338 ccw(c15.241,23.338) 15.241,23.315 15.576,23.315 cw(c15.576,23.292) 15.599,23.292 15.599,23.201 15.65,23.15 v1(16.35,23.15) ; v1@12.282,23.443 cw(c12.539,23.186) 12.539,23.55 cw(c12.539,23.914) v1@12.282,23.657 ; v1@16.243,23.043 ccw(c15.986,22.786) 15.986,23.15 ccw(c15.986,23.514) v1@16.243,23.257
ADDR4: U3.G2 U4.B3 | length 31.8
  Top Layer w0.102: U4.B3@10.975,25.05 11.35,25.425 12.65,25.425 12.825,25.6 12.825,26.35 13.275,26.8 15.085,26.8 15.2,26.685 15.2,26.341 cw(c15.177,26.341) 15.177,26.318 14.588,26.318 ccw(c14.588,26.295) 14.565,26.295 14.565,26.113 ccw(c14.588,26.113) 14.588,26.09 15.739,26.09 cw(c15.739,26.067) 15.761,26.067 15.761,25.884 cw(c15.739,25.884) 15.739,25.861 14.588,25.861 ccw(c14.588,25.838) 14.565,25.838 14.565,25.655 ccw(c14.588,25.655) 14.588,25.633 15.812,25.633 cw(c15.812,25.61) 15.835,25.61 15.835,25.427 cw(c15.812,25.427) 15.812,25.404 14.588,25.404 ccw(c14.588,25.381) 14.565,25.381 14.565,25.198 ccw(c14.588,25.198) 14.588,25.175 15.812,25.175 cw(c15.812,25.152) 15.835,25.152 15.835,24.97 cw(c15.812,24.97) 15.812,24.947 14.588,24.947 ccw(c14.588,24.924) 14.565,24.924 14.565,24.741 ccw(c14.588,24.741) 14.588,24.718 15.812,24.718 cw(c15.812,24.695) 15.835,24.695 15.835,24.512 cw(c15.812,24.512) 15.812,24.49 14.588,24.49 ccw(c14.588,24.467) 14.565,24.467 14.565,24.284 ccw(c14.588,24.284) 14.588,24.261 15.812,24.261 cw(c15.812,24.238) 15.835,24.238 15.835,24.055 cw(c15.812,24.055) 15.812,24.032 14.588,24.032 ccw(c14.588,24.009) 14.565,24.009 14.565,23.827 ccw(c14.588,23.827) 14.588,23.804 15.812,23.804 cw(c15.812,23.781) 15.835,23.781 15.835,23.598 cw(c15.812,23.598) 15.812,23.575 14.588,23.575 ccw(c14.588,23.552) 14.565,23.552 14.565,23.369 ccw(c14.588,23.369) 14.588,23.347 15.812,23.347 cw(c15.812,23.324) 15.835,23.324 15.835,23.141 cw(c15.812,23.141) 15.812,23.118 14.588,23.118 ccw(c14.588,23.095) 14.565,23.095 14.565,22.912 ccw(c14.588,22.912) 14.588,22.889 15.177,22.889 cw(c15.177,22.866) 15.2,22.866 15.2,22.775 15.225,22.75 16.3,22.75 ; U4.B3@10.975,25.144 ccw(c10.975,25.372) 11.136,25.211 ccw(c11.297,25.05) U4.B3@11.069,25.05 ; 16.292,22.758 16.3,22.75 ; U3.G2@17.701,23.15 cw(c17.28,23.15) 17.578,22.853 cw(c17.875,22.555) U3.G2@17.875,22.976 ; U3.G2@17.875,23.15 17.475,22.75 16.3,22.75
ADDR5: U3.F1 U4.B4 | length 35
  Top Layer w0.102: U4.B4@10.975,24.206 cw(c10.975,23.978) 11.136,24.139 cw(c11.297,24.3) U4.B4@11.069,24.3 ; U4.B4@10.975,24.3 v1(11.35,23.925) ; v1@11.199,23.925 ccw(c10.835,23.925) 11.093,24.182 ccw(c11.35,24.44) v1@11.35,24.076 ; v1@16.375,23.922 17.047,23.922 U3.F1@17.075,23.95 ; v1@16.482,23.818 cw(c16.731,23.569) 16.731,23.922 ; v1@16.482,24.032 ccw(c16.747,24.297) 16.747,23.922 ; 16.586,23.922 ccw(c16.586,24.439) U3.F1@16.952,24.073 ; 16.723,23.922 cw(c16.723,23.598) U3.F1@16.952,23.827 ; 16.832,23.922 ccw(c16.832,24.193) U3.F1@17.024,24.001
  Bottom Layer w0.102: v1(11.35,23.925) 14.275,23.925 14.328,23.978 14.328,30.85 14.403,30.925 16.1,30.925 16.2,30.825 16.2,30.475 16.2,30.313 ccw(c16.223,30.313) 16.223,30.29 16.558,30.29 cw(c16.558,30.267) 16.581,30.267 16.581,30.084 cw(c16.558,30.084) 16.558,30.061 16.2,30.061 15.842,30.061 ccw(c15.842,30.038) 15.819,30.038 15.819,29.855 ccw(c15.842,29.855) 15.842,29.833 16.2,29.833 16.558,29.833 cw(c16.558,29.81) 16.581,29.81 16.581,29.627 cw(c16.558,29.627) 16.558,29.604 16.2,29.604 15.842,29.604 ccw(c15.842,29.581) 15.819,29.581 15.819,29.398 ccw(c15.842,29.398) 15.842,29.375 16.2,29.375 16.558,29.375 cw(c16.558,29.352) 16.581,29.352 16.581,29.17 cw(c16.558,29.17) 16.558,29.147 16.2,29.147 15.842,29.147 ccw(c15.842,29.124) 15.819,29.124 15.819,28.941 ccw(c15.842,28.941) 15.842,28.918 16.2,28.918 16.558,28.918 cw(c16.558,28.895) 16.581,28.895 16.581,28.712 cw(c16.558,28.712) 16.558,28.69 16.2,28.69 15.842,28.69 ccw(c15.842,28.667) 15.819,28.667 15.819,28.484 ccw(c15.842,28.484) 15.842,28.461 16.2,28.461 16.558,28.461 cw(c16.558,28.438) 16.581,28.438 16.581,28.255 cw(c16.558,28.255) 16.558,28.232 16.2,28.232 15.842,28.232 ccw(c15.842,28.209) 15.819,28.209 15.819,28.027 ccw(c15.842,28.027) 15.842,28.004 16.2,28.004 16.558,28.004 cw(c16.558,27.981) 16.581,27.981 16.581,27.798 cw(c16.558,27.798) 16.558,27.775 16.2,27.775 15.842,27.775 ccw(c15.842,27.752) 15.819,27.752 15.819,27.569 ccw(c15.842,27.569) 15.842,27.547 16.2,27.547 16.558,27.547 cw(c16.558,27.524) 16.581,27.524 16.581,27.341 cw(c16.558,27.341) 16.558,27.318 16.2,27.318 15.842,27.318 ccw(c15.842,27.295) 15.819,27.295 15.819,27.112 ccw(c15.842,27.112) 15.842,27.089 16.177,27.089 cw(c16.177,27.066) 16.2,27.066 16.2,26.975 16.2,24.1 v1(16.375,23.925) ; v1@11.457,23.818 cw(c11.714,23.561) 11.714,23.925 cw(c11.714,24.289) v1@11.457,24.032 ; 16.2,24.221 ccw(c16.671,24.221) v1@16.338,23.888 ; 16.2,24.466 ccw(c16.916,24.466) v1@16.41,23.96 ; 16.2,24.712 ccw(c17.162,24.712) v1@16.482,24.032
ADDR6: U3.F2 U4.C3 | length 35.1
  Top Layer w0.102: U4.C3@10.225,25.05 v1(10.6,25.425) ; U4.C3@10.225,25.144 ccw(c10.225,25.371) 10.385,25.211 ccw(c10.547,25.05) U4.C3@10.319,25.05 ; v1@10.449,25.425 cw(c10.085,25.425) 10.343,25.168 cw(c10.6,24.911) v1@10.6,25.274 ; U3.F2@17.875,23.95 v1(18.275,24.35) ; U3.F2@17.875,24.124 ccw(c17.875,24.544) v1@18.172,24.247 ; U3.F2@17.965,24.128 ccw(c17.802,24.41) v1@18.125,24.369 ; U3.F2@18.049,23.95 cw(c18.47,23.95) v1@18.172,24.248 ; U3.F2@18.053,24.04 cw(c18.335,23.877) v1@18.294,24.201 ; 18.057,24.181 cw(c18.175,23.977) v1@18.236,24.205 ; 18.106,24.132 ccw(c17.902,24.25) v1@18.129,24.311 ; v1@18.124,24.35 cw(c17.76,24.35) 18.018,24.093 cw(c18.275,23.836) v1@18.275,24.199
  Bottom Layer w0.102: v1(10.6,25.425) 13.525,25.425 13.625,25.525 13.625,32.95 13.75,33.075 15.8,33.075 15.891,33.075 ccw(c15.891,33.098) 15.914,33.098 15.914,33.433 cw(c15.937,33.433) 15.937,33.456 16.12,33.456 cw(c16.12,33.433) 16.143,33.433 16.143,33.075 16.143,32.717 ccw(c16.166,32.717) 16.166,32.694 16.349,32.694 ccw(c16.349,32.717) 16.372,32.717 16.372,33.075 16.372,33.433 cw(c16.394,33.433) 16.394,33.456 16.577,33.456 cw(c16.577,33.433) 16.6,33.433 16.6,33.075 16.6,32.717 ccw(c16.623,32.717) 16.623,32.694 16.806,32.694 ccw(c16.806,32.717) 16.829,32.717 16.829,33.075 16.829,33.433 cw(c16.852,33.433) 16.852,33.456 17.034,33.456 cw(c17.034,33.433) 17.057,33.433 17.057,33.075 17.057,32.717 ccw(c17.08,32.717) 17.08,32.694 17.263,32.694 ccw(c17.263,32.717) 17.286,32.717 17.286,33.075 17.286,33.433 cw(c17.309,33.433) 17.309,33.456 17.492,33.456 cw(c17.492,33.433) 17.515,33.433 17.515,33.075 17.515,32.717 ccw(c17.537,32.717) 17.537,32.694 17.72,32.694 ccw(c17.72,32.717) 17.743,32.717 17.743,33.075 17.75,33.075 18.125,33.075 18.275,32.925 v1(18.275,24.35) ; v1@10.706,25.319 cw(c10.964,25.061) 10.964,25.425 cw(c10.964,25.789) v1@10.706,25.532 ; v1@18.168,24.457 ccw(c17.911,24.714) 18.275,24.714 ccw(c18.639,24.714) v1@18.382,24.457
ADDR7: U3.E1 U4.C4 | length 34.6
  Top Layer w0.102: U4.C4@10.225,24.3 v1(10.6,24.675) ; U4.C4@10.225,24.394 ccw(c10.225,24.621) 10.385,24.461 ; U4.C4@10.319,24.3 cw(c10.547,24.3) 10.386,24.461 ; v1@10.449,24.675 cw(c10.085,24.675) 10.343,24.418 cw(c10.6,24.161) v1@10.6,24.524 ; U3.E1@17.075,24.75 v1(17.475,25.15) ; U3.E1@17.075,24.924 ccw(c17.075,25.345) 17.372,25.047 ccw(c17.67,24.75) U3.E1@17.249,24.75 ; U3.E1@17.165,24.928 ccw(c17.002,25.21) v1@17.326,25.169 ; U3.E1@17.253,24.84 cw(c17.535,24.677) v1@17.494,25.001 ; 17.257,24.981 cw(c17.375,24.777) v1@17.436,25.004 ; 17.306,24.932 ccw(c17.102,25.05) v1@17.329,25.111 ; v1@17.324,25.15 cw(c16.96,25.15) 17.218,24.893 cw(c17.475,24.635) v1@17.475,24.999
  Bottom Layer w0.102: v1(10.6,24.675) 10.975,25.05 13.775,25.05 13.85,25.125 13.85,32.1 13.975,32.225 17.3,32.225 17.475,32.05 17.475,31.8 17.475,31.709 ccw(c17.498,31.709) 17.498,31.686 17.833,31.686 cw(c17.833,31.663) 17.856,31.663 17.856,31.48 cw(c17.833,31.48) 17.833,31.457 17.475,31.457 17.117,31.457 ccw(c17.117,31.434) 17.094,31.434 17.094,31.251 ccw(c17.117,31.251) 17.117,31.228 17.475,31.228 17.833,31.228 cw(c17.833,31.206) 17.856,31.206 17.856,31.023 cw(c17.833,31.023) 17.833,31 17.475,31 17.117,31 ccw(c17.117,30.977) 17.094,30.977 17.094,30.794 ccw(c17.117,30.794) 17.117,30.771 17.475,30.771 17.833,30.771 cw(c17.833,30.748) 17.856,30.748 17.856,30.566 cw(c17.833,30.566) 17.833,30.543 17.475,30.543 17.117,30.543 ccw(c17.117,30.52) 17.094,30.52 17.094,30.337 ccw(c17.117,30.337) 17.117,30.314 17.475,30.314 17.833,30.314 cw(c17.833,30.291) 17.856,30.291 17.856,30.108 cw(c17.833,30.108) 17.833,30.085 17.475,30.085 17.117,30.085 ccw(c17.117,30.063) 17.094,30.063 17.094,29.88 ccw(c17.117,29.88) 17.117,29.857 17.475,29.857 17.833,29.857 cw(c17.833,29.834) 17.856,29.834 17.856,29.651 cw(c17.833,29.651) 17.833,29.628 17.475,29.628 17.117,29.628 ccw(c17.117,29.605) 17.094,29.605 17.094,29.423 ccw(c17.117,29.423) 17.117,29.4 17.475,29.4 17.833,29.4 cw(c17.833,29.377) 17.856,29.377 17.856,29.194 cw(c17.833,29.194) 17.833,29.171 17.498,29.171 ccw(c17.498,29.148) 17.475,29.148 17.475,29.025 v1(17.475,25.15) ; v1@10.6,24.826 ccw(c10.6,25.19) 10.857,24.932 ccw(c11.114,24.675) v1@10.751,24.675 ; v1@17.368,25.257 ccw(c17.111,25.514) 17.475,25.514 ccw(c17.839,25.514) v1@17.582,25.257
ADDR8: U3.E2 U4.D4 | length 34.5
  Top Layer w0.102: U4.D4@9.475,24.206 cw(c9.475,23.978) 9.636,24.139 cw(c9.797,24.3) U4.D4@9.569,24.3 ; U4.D4@9.475,24.3 v1(9.85,23.925) ; v1@9.699,23.925 ccw(c9.335,23.925) 9.593,24.182 ccw(c9.85,24.44) v1@9.85,24.076 ; v1@17.456,24.5 ccw(c17.415,24.823) U3.E2@17.697,24.66 ; v1(17.475,24.35) U3.E2@17.875,24.75 ; v1@17.475,24.501 ccw(c17.475,24.865) 17.732,24.607 ccw(c17.99,24.35) v1@17.626,24.35 ; v1@17.514,24.496 ccw(c17.575,24.723) 17.693,24.519 ; v1@17.621,24.389 cw(c17.848,24.45) 17.644,24.568 ; v1@17.625,24.331 cw(c17.948,24.29) U3.E2@17.785,24.572 ; U3.E2@17.701,24.75 cw(c17.28,24.75) 17.578,24.453 cw(c17.875,24.155) U3.E2@17.875,24.576
  Bottom Layer w0.102: v1(9.85,23.925) 10.5,23.925 11.3,24.725 13.975,24.725 14.125,24.875 14.125,31.275 14.2,31.35 16.75,31.35 16.872,31.228 16.872,27.2 16.872,27.055 cw(c16.849,27.055) 16.849,27.032 16.514,27.032 ccw(c16.514,27.009) 16.491,27.009 16.491,26.826 ccw(c16.514,26.826) 16.514,26.803 16.872,26.803 17.23,26.803 cw(c17.23,26.78) 17.253,26.78 17.253,26.597 cw(c17.23,26.597) 17.23,26.575 16.872,26.575 16.514,26.575 ccw(c16.514,26.552) 16.491,26.552 16.491,26.369 ccw(c16.514,26.369) 16.514,26.346 16.872,26.346 17.23,26.346 cw(c17.23,26.323) 17.253,26.323 17.253,26.14 cw(c17.23,26.14) 17.23,26.117 16.872,26.117 16.514,26.117 ccw(c16.514,26.094) 16.491,26.094 16.491,25.912 ccw(c16.514,25.912) 16.514,25.889 16.872,25.889 17.23,25.889 cw(c17.23,25.866) 17.253,25.866 17.253,25.683 cw(c17.23,25.683) 17.23,25.66 16.872,25.66 16.514,25.66 ccw(c16.514,25.637) 16.491,25.637 16.491,25.454 ccw(c16.514,25.454) 16.514,25.432 16.872,25.432 17.106,25.432 cw(c17.106,25.409) 17.129,25.409 17.129,25.226 cw(c17.106,25.226) 17.106,25.203 16.872,25.203 16.514,25.203 ccw(c16.514,25.18) 16.491,25.18 16.491,24.997 ccw(c16.514,24.997) 16.514,24.974 16.872,24.974 17.155,24.974 cw(c17.155,24.951) 17.178,24.951 17.178,24.769 cw(c17.155,24.769) 17.155,24.746 16.872,24.746 16.514,24.746 ccw(c16.514,24.723) 16.491,24.723 16.491,24.54 ccw(c16.514,24.54) 16.514,24.517 16.849,24.517 cw(c16.849,24.494) 16.872,24.494 16.872,24.403 16.925,24.35 v1(17.475,24.35) ; v1@9.957,23.818 cw(c10.214,23.561) 10.214,23.925 cw(c10.214,24.289) v1@9.957,24.032 ; v1@17.368,24.243 ccw(c17.111,23.986) 17.111,24.35 ccw(c17.111,24.714) v1@17.368,24.457
ADDR9: U3.D1 U4.H2 | length 31.4
  Top Layer w0.102: U4.H2@6.408,25.733 ccw(c6.248,25.573) 6.248,25.8 ccw(c6.248,26.027) U4.H2@6.408,25.867 ; U4.H2@6.475,25.8 5.925,25.8 5.9,25.825 5.9,25.916 ccw(c5.877,25.916) 5.877,25.939 5.669,25.939 cw(c5.669,25.962) 5.646,25.962 5.646,26.145 cw(c5.669,26.145) 5.669,26.168 6.131,26.168 ccw(c6.131,26.191) 6.154,26.191 6.154,26.374 ccw(c6.131,26.374) 6.131,26.397 5.669,26.397 cw(c5.669,26.419) 5.646,26.419 5.646,26.602 cw(c5.669,26.602) 5.669,26.625 6.131,26.625 ccw(c6.131,26.648) 6.154,26.648 6.154,26.831 ccw(c6.131,26.831) 6.131,26.854 5.669,26.854 cw(c5.669,26.877) 5.646,26.877 5.646,27.059 cw(c5.669,27.059) 5.669,27.082 6.102,27.082 ccw(c6.102,27.105) 6.125,27.105 6.125,27.288 ccw(c6.102,27.288) 6.102,27.311 5.669,27.311 cw(c5.669,27.334) 5.646,27.334 5.646,27.517 cw(c5.669,27.517) 5.669,27.54 6.131,27.54 ccw(c6.131,27.562) 6.154,27.562 6.154,27.745 ccw(c6.131,27.745) 6.131,27.768 5.923,27.768 cw(c5.923,27.791) 5.9,27.791 5.9,27.875 5.929,27.904 12.878,27.904 13.005,27.904 cw(c13.005,27.881) 13.028,27.881 13.028,27.022 ccw(c13.051,27.022) 13.051,26.999 13.234,26.999 ccw(c13.234,27.022) 13.257,27.022 13.257,27.881 cw(c13.28,27.881) 13.28,27.904 13.463,27.904 cw(c13.463,27.881) 13.485,27.881 13.485,27.026 ccw(c13.508,27.026) 13.508,27.003 13.691,27.003 ccw(c13.691,27.026) 13.714,27.026 13.714,27.881 cw(c13.737,27.881) 13.737,27.904 13.92,27.904 cw(c13.92,27.881) 13.943,27.881 13.943,27.026 ccw(c13.965,27.026) 13.965,27.003 14.148,27.003 ccw(c14.148,27.026) 14.171,27.026 14.171,27.881 cw(c14.194,27.881) 14.194,27.904 14.377,27.904 cw(c14.377,27.881) 14.4,27.881 14.4,27.026 ccw(c14.423,27.026) 14.423,27.003 14.606,27.003 ccw(c14.606,27.026) 14.628,27.026 14.628,27.881 cw(c14.651,27.881) 14.651,27.904 14.834,27.904 cw(c14.834,27.881) 14.857,27.881 14.857,27.026 ccw(c14.88,27.026) 14.88,27.003 15.063,27.003 ccw(c15.063,27.026) 15.086,27.026 15.086,27.881 cw(c15.108,27.881) 15.108,27.904 15.291,27.904 cw(c15.291,27.881) 15.314,27.881 15.314,26.867 ccw(c15.337,26.867) 15.337,26.844 15.52,26.844 ccw(c15.52,26.867) 15.543,26.867 15.543,27.881 cw(c15.566,27.881) 15.566,27.904 15.657,27.904 15.682,27.879 15.682,26.443 16.575,25.55 U3.D1@17.075,25.55 ; U3.D1@16.952,25.427 ccw(c16.654,25.129) 16.654,25.55 ccw(c16.654,25.971) U3.D1@16.952,25.673
ADDR10: U3.D2 U4.H3 | length 31.2
  Top Layer w0.102: U4.H3@6.408,24.983 ccw(c6.248,24.823) 6.248,25.05 ccw(c6.248,25.277) U4.H3@6.408,25.117 ; U4.H3@6.475,25.05 4.998,25.05 4.948,25.101 4.948,25.212 cw(c4.97,25.212) 4.97,25.235 5.433,25.235 ccw(c5.433,25.258) 5.456,25.258 5.456,25.441 ccw(c5.433,25.441) 5.433,25.463 4.462,25.463 cw(c4.462,25.486) 4.44,25.486 4.44,25.669 cw(c4.462,25.669) 4.462,25.692 5.428,25.692 ccw(c5.428,25.715) 5.451,25.715 5.451,25.898 ccw(c5.428,25.898) 5.428,25.921 4.462,25.921 cw(c4.462,25.944) 4.44,25.944 4.44,26.126 cw(c4.462,26.126) 4.462,26.149 5.421,26.149 ccw(c5.421,26.172) 5.444,26.172 5.444,26.355 ccw(c5.421,26.355) 5.421,26.378 4.462,26.378 cw(c4.462,26.401) 4.44,26.401 4.44,26.584 cw(c4.462,26.584) 4.462,26.607 5.421,26.607 ccw(c5.421,26.629) 5.444,26.629 5.444,26.812 ccw(c5.421,26.812) 5.421,26.835 4.462,26.835 cw(c4.462,26.858) 4.44,26.858 4.44,27.041 cw(c4.462,27.041) 4.462,27.064 5.421,27.064 ccw(c5.421,27.087) 5.444,27.087 5.444,27.269 ccw(c5.421,27.269) 5.421,27.292 4.462,27.292 cw(c4.462,27.315) 4.44,27.315 4.44,27.498 cw(c4.462,27.498) 4.462,27.521 5.421,27.521 ccw(c5.421,27.544) 5.444,27.544 5.444,27.727 ccw(c5.421,27.727) 5.421,27.749 4.97,27.749 cw(c4.97,27.772) 4.948,27.772 4.948,28.112 4.982,28.146 15.77,28.146 15.885,28.032 15.885,26.665 16.6,25.95 17.475,25.95 U3.D2@17.875,25.55 ; U3.D2@17.701,25.55 ccw(c17.28,25.55) 17.578,25.847 ccw(c17.875,26.145) U3.D2@17.875,25.724
ADDR11: U3.C1 U4.H4 | length 31.6
  Top Layer w0.102: U4.H4@6.408,24.233 ccw(c6.248,24.073) 6.248,24.3 ccw(c6.248,24.527) U4.H4@6.408,24.367 ; U4.H4@6.475,24.3 5.903,24.3 ccw(c5.903,24.277) 5.88,24.277 5.88,23.815 cw(c5.857,23.815) 5.857,23.792 5.674,23.792 cw(c5.674,23.815) 5.651,23.815 5.651,24.785 ccw(c5.629,24.785) 5.629,24.808 5.446,24.808 ccw(c5.446,24.785) 5.423,24.785 5.423,23.815 cw(c5.4,23.815) 5.4,23.792 5.217,23.792 cw(c5.217,23.815) 5.194,23.815 5.194,24.785 ccw(c5.171,24.785) 5.171,24.808 4.989,24.808 ccw(c4.989,24.785) 4.966,24.785 4.966,23.815 cw(c4.943,23.815) 4.943,23.792 4.76,23.792 cw(c4.76,23.815) 4.737,23.815 4.737,24.785 ccw(c4.714,24.785) 4.714,24.808 4.531,24.808 ccw(c4.531,24.785) 4.508,24.785 4.508,23.815 cw(c4.486,23.815) 4.486,23.792 3.97,23.792 3.937,23.825 3.937,23.917 ccw(c3.914,23.917) 3.914,23.939 3.579,23.939 cw(c3.579,23.962) 3.556,23.962 3.556,24.145 cw(c3.579,24.145) 3.579,24.168 3.937,24.168 4.295,24.168 ccw(c4.295,24.191) 4.318,24.191 4.318,24.374 ccw(c4.295,24.374) 4.295,24.397 3.937,24.397 3.579,24.397 cw(c3.579,24.42) 3.556,24.42 3.556,24.602 cw(c3.579,24.602) 3.579,24.625 3.937,24.625 3.937,24.638 3.937,28.346 3.999,28.408 15.915,28.408 16.088,28.235 16.088,26.862 16.6,26.35 U3.C1@17.075,26.35 ; U3.C1@16.952,26.227 ccw(c16.654,25.929) 16.654,26.35 ccw(c16.654,26.771) U3.C1@16.952,26.473
ADDR12: U3.C2 U4.H5 | length 31.8
  Top Layer w0.102: U4.H5@6.408,23.483 ccw(c6.248,23.323) 6.248,23.55 ccw(c6.248,23.777) U4.H5@6.408,23.617 ; U4.H5@6.475,23.55 3.348,23.55 3.302,23.596 3.302,25.425 3.302,25.491 cw(c3.325,25.491) 3.325,25.514 3.533,25.514 ccw(c3.533,25.537) 3.556,25.537 3.556,25.72 ccw(c3.533,25.72) 3.533,25.743 3.302,25.743 3.071,25.743 cw(c3.071,25.766) 3.048,25.766 3.048,25.949 cw(c3.071,25.949) 3.071,25.971 3.302,25.971 3.533,25.971 ccw(c3.533,25.994) 3.556,25.994 3.556,26.177 ccw(c3.533,26.177) 3.533,26.2 3.302,26.2 3.071,26.2 cw(c3.071,26.223) 3.048,26.223 3.048,26.406 cw(c3.071,26.406) 3.071,26.429 3.302,26.429 3.533,26.429 ccw(c3.533,26.452) 3.556,26.452 3.556,26.634 ccw(c3.533,26.634) 3.533,26.657 3.302,26.657 3.071,26.657 cw(c3.071,26.68) 3.048,26.68 3.048,26.863 cw(c3.071,26.863) 3.071,26.886 3.302,26.886 3.533,26.886 ccw(c3.533,26.909) 3.556,26.909 3.556,27.092 ccw(c3.533,27.092) 3.533,27.114 3.302,27.114 3.071,27.114 cw(c3.071,27.137) 3.048,27.137 3.048,27.32 cw(c3.071,27.32) 3.071,27.343 3.302,27.343 3.533,27.343 ccw(c3.533,27.366) 3.556,27.366 3.556,27.549 ccw(c3.533,27.549) 3.533,27.572 3.302,27.572 3.071,27.572 cw(c3.071,27.595) 3.048,27.595 3.048,27.777 cw(c3.071,27.777) 3.071,27.8 3.302,27.8 3.533,27.8 ccw(c3.533,27.823) 3.556,27.823 3.556,28.006 ccw(c3.533,28.006) 3.533,28.029 3.302,28.029 3.071,28.029 cw(c3.071,28.052) 3.048,28.052 3.048,28.235 cw(c3.071,28.235) 3.071,28.258 3.302,28.258 3.533,28.258 ccw(c3.533,28.28) 3.556,28.28 3.556,28.463 ccw(c3.533,28.463) 3.533,28.486 3.325,28.486 cw(c3.325,28.509) 3.302,28.509 3.302,28.6 3.364,28.662 16.035,28.662 16.291,28.406 16.291,27.168 16.709,26.75 17.475,26.75 U3.C2@17.875,26.35 ; U3.C2@17.701,26.35 ccw(c17.28,26.35) 17.578,26.647 ccw(c17.875,26.945) U3.C2@17.875,26.524